# Altium PCB 4th_4G - V4.1.PcbDoc
Units mm, origin at the board's own origin, x right, y up, seen from the top; angles counter-clockwise.
Board outline 35.75 x 48.25 mm, 2 copper layers (Top Layer, Bottom Layer); 38 components, 24 nets, 250 pads, 39 vias.
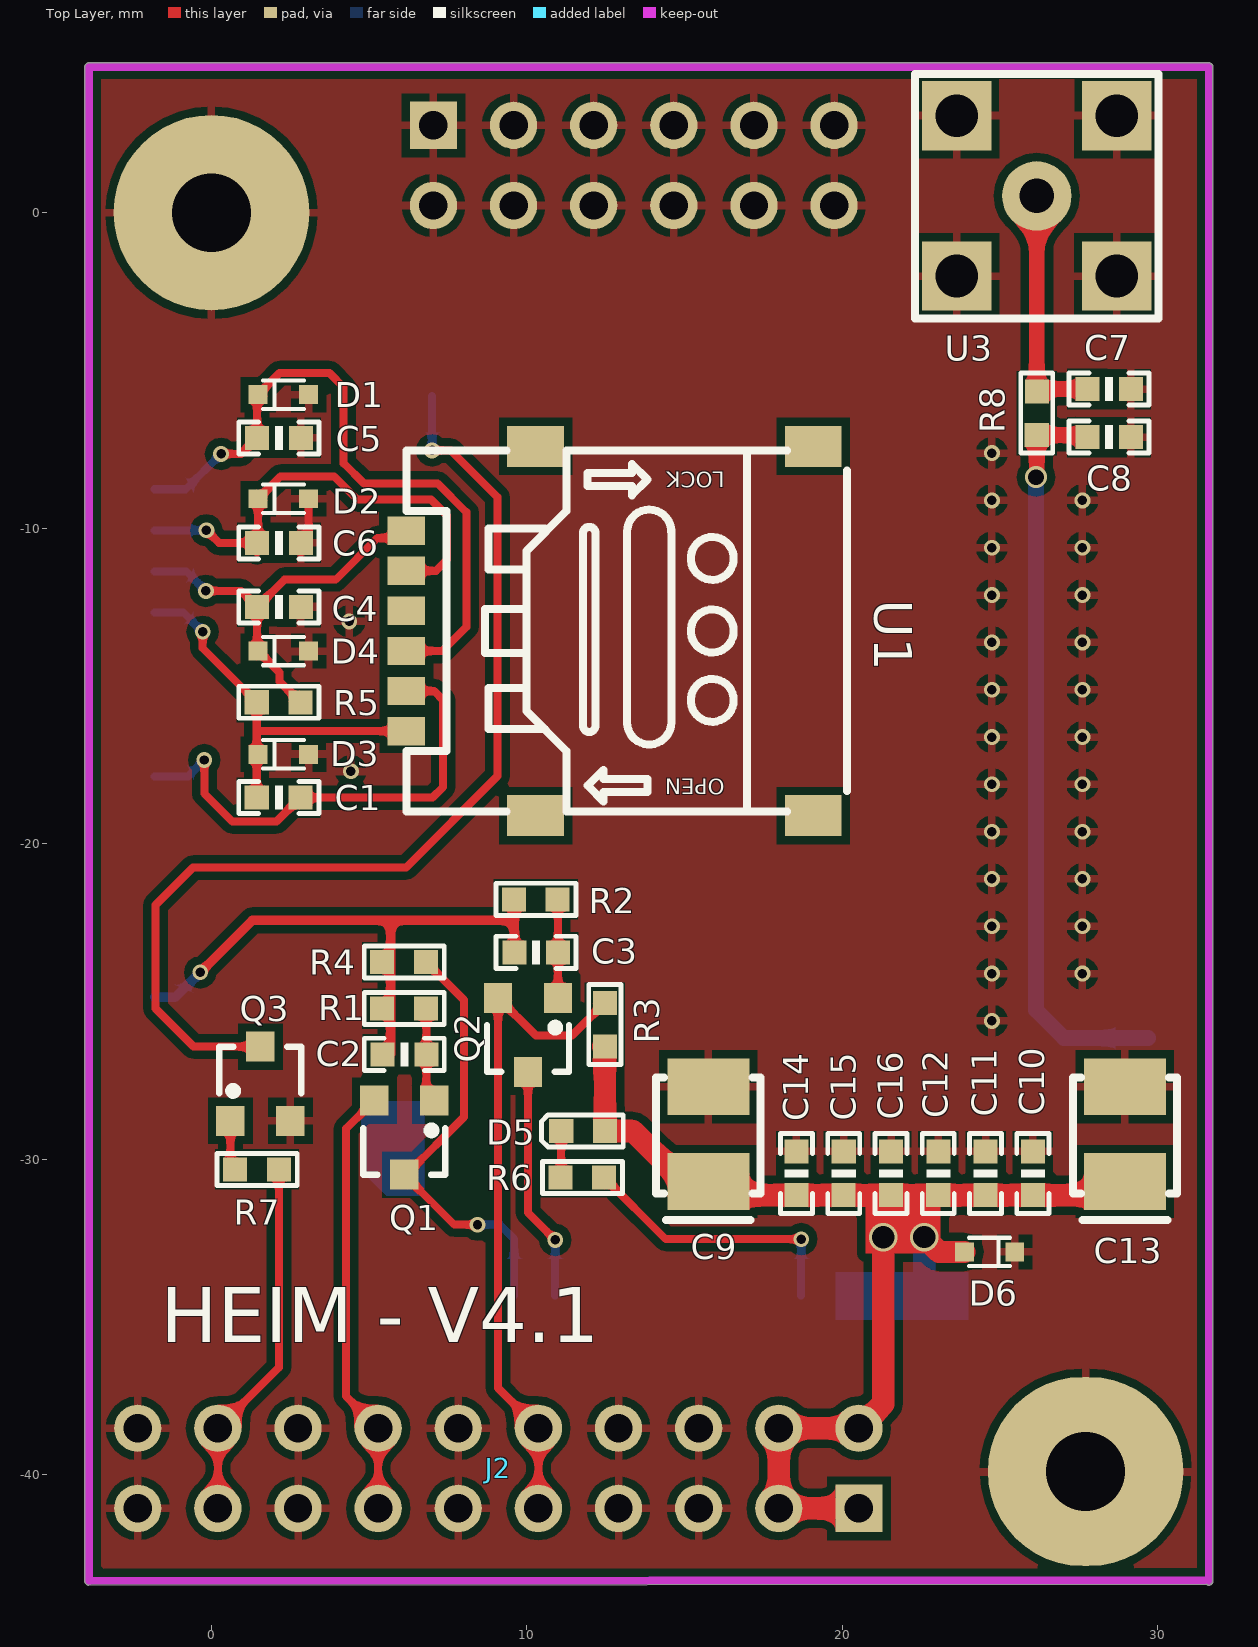
[diagram p0: Top Layer view]
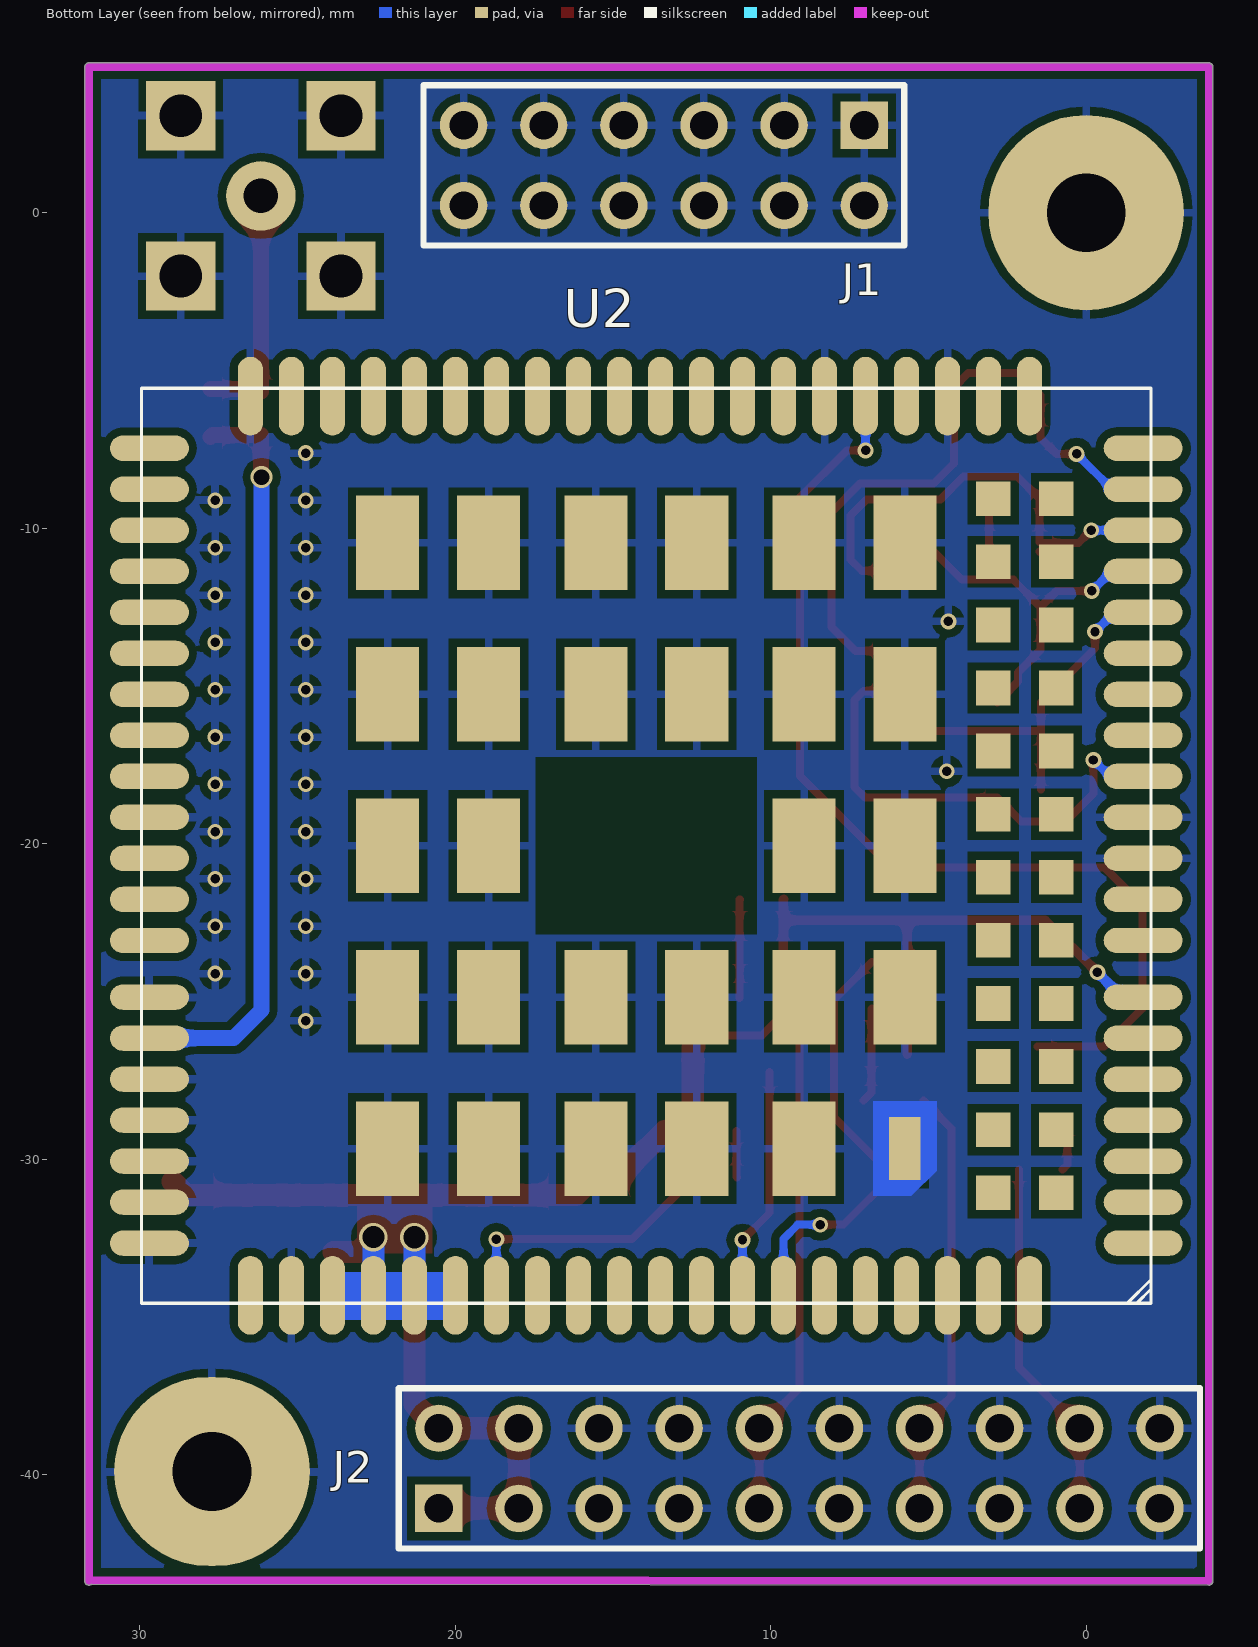
[diagram p1: Bottom Layer view, seen from below]

## Layer stack, top to bottom
Top Solder: solder mask 0.0102, Solder Resist, Dk 3.5
Top Layer: signal copper 0.0356
Dielectric 1: dielectric 0.32, FR-4, Dk 4.8
Bottom Layer: signal copper 0.0356
Bottom Solder: solder mask 0.0102, Solder Resist, Dk 3.5

## Board outline
-4.014,-43.377 -4.014,4.623 cw(c-3.886,4.623) -3.886,4.75 31.614,4.75 cw(c31.614,4.623) 31.741,4.623 31.741,-43.377 cw(c31.614,-43.377) 31.533,-43.476 -3.886,-43.505 cw(c-3.886,-43.377)

## Design rules (kind name [scope] priority, off if disabled: settings)
Clearance [All] p1: gap=0.254
PolygonConnect [All] p1: connectstyle=Relief reliefconductorwidth=0.254 reliefentries=4 polygonreliefangle="90 Angle" airgapwidth=0.254
RoutingVias [All] p1: holewidth=0.3 width=0.5 viastyle="Through Hole" minholewidth=0.3 minwidth=0.5 maxholewidth=1 maxwidth=1.5
SolderMaskExpansion [All] p1: expansion=0.102
Width [All] p1: maxlimit=1 minlimit=0.254 preferedwidth=0.254
30 further rules are at their usual default settings.

## Components (designator, comment, footprint, x,y, rotation, side; value= is the part's Value field where it differs from the comment)
C1 "100NF/50V" 0603_C 2.134,-18.542 r180 top
C2 "1NF/50V" 0603_C 6.111,-26.677 r0 top
C3 "1NF/50V" 0603_C 10.287,-23.444 r0 top
C4 "33PF/50V" 0603_C 2.134,-12.497 r0 top
C5 "33PF/50V" 0603_C 2.134,-7.137 r0 top
C6 "33PF/50V" 0603_C 2.134,-10.465 r0 top
C7 "[NC]" 0603_C 28.448,-5.588 r0 top
C8 "[NC]" 0603_C 28.448,-7.112 r0 top
C9 "100UF/6.3V" CASE-B_3528 15.748,-30.709 r270 top
C10 "100NF/50V" 0603_C 26.035,-30.455 r90 top
C11 "33PF/50V" 0603_C 24.536,-30.455 r90 top
C12 "10PF/50V" 0603_C 23.038,-30.455 r90 top
C13 "100UF/6.3V" CASE-B_3528 28.956,-30.709 r270 top
C14 "100NF/50V" 0603_C 18.542,-30.455 r90 top
C15 "33PF/50V" 0603_C 20.041,-30.455 r90 top
C16 "10PF/50V" 0603_C 21.539,-30.455 r90 top
D1 "PESDNC5D5VB" SOD-523 2.278,-5.766 r0 top
D2 "PESDNC5D5VB" SOD-523 2.278,-9.068 r0 top
D3 "PESDNC5D5VB" SOD-523 2.278,-17.17 r0 top
D4 "PESDNC5D5VB" SOD-523 2.278,-13.894 r0 top
D5 "绿色" 0603_D 11.786,-29.108 r180 top
D6 "PESDNC5D5VB" SOD-523 24.663,-32.944 r180 top
J1 "Header 6X2A" HDR2X6_CEN 7.036,2.769 r0 bottom locked
J2 "Header 10X2A" HDR2X10_CEN 20.523,-41.072 r180 top locked
Q1 "BC817-40" SOT-23-3 6.111,-29.318 r180 top
Q2 "BC817-40" SOT-23-3 10.033,-26.06 r180 top
Q3 "BC817-40" SOT-23-3 1.549,-27.61 r0 top
R1 "10KΩ/1%" 0603_R 6.111,-25.229 r180 top
R2 "10KΩ/1%" 0603_R 10.287,-21.768 r180 top
R3 "10KΩ/1%" 0603_R 12.471,-25.73 r270 top
R4 "10KΩ/1%" 0603_R 6.111,-23.756 r180 top
R5 "15K" 0603_R 2.134,-15.519 r180 top
R6 "470Ω/1%" 0603_R 11.76,-30.582 r180 top
R7 "4.7KΩ/1%" 0603_R 1.448,-30.328 r180 top
R8 "0Ω" 0603_R 26.162,-6.35 r270 top
U1 "SIM卡座" SIM卡座-NANO掀盖式 12.624,-13.259 r180 top
U2 "EC20 R2.0" EC20_R2.0 13.945,-20.066 r0 bottom
U3 "ANT" SMA-KWE/弯头 23.622,-2.007 r0 top

## Footprints (in the part's own frame and the unit in brackets; to place one, negate y for a bottom-side part, rotate by r counter-clockwise, add the part's x,y. Pads: shape width x height; smd on the part's side, far side on the other; paste and mask are expansions set on the pad)
0603_C [mil] "电容"
  rect 30x30 smd: 1(-27,0) 2(27.5,-0.06)
  silkscreen extent -50,-20 50,20
0603_D [mil] "贴片发光二极管"
  rect 30x30 smd: 1(-27,0) 2(27.5,-0.06)
  silkscreen extent -50,-20 52,20
0603_R [mil] "电阻"
  rect 30x30 smd: 1(-27,0) 2(27.5,-0.06)
  silkscreen extent -50,-20 50,20
CASE-B_3528 [mm]
  rect 1.8x2.6 smd: 1(0,0) 2(-3.002,0)
  silkscreen extent -3.3,-1.65 1.23,1.65
EC20_R2.0 [mm] "移远通信4G模块"
  oval 2.5x0.8 smd: 1(-15.75,12.6) 2(-15.75,11.3) 3(-15.75,10) 4(-15.75,8.7) 5(-15.75,7.4) 6(-15.75,6.1) 7(-15.75,4.8) 8(-15.75,0.4) 9(-15.75,-0.9) 10(-15.75,-2.2) 11(-15.75,-3.5) 12(-15.75,-4.8) 13(-15.75,-6.1) 14(-15.75,-7.4) 15(-15.75,-8.7) 16(-15.75,-10) 17(-15.75,-11.3) 18(-15.75,-12.6) 37(15.75,-12.6) 38(15.75,-11.3) 39(15.75,-10) 40(15.75,-8.7) 41(15.75,-7.4) 42(15.75,-6.1) 43(15.75,-4.8) 44(15.75,-3.5) 45(15.75,-2.2) 46(15.75,-0.9) 47(15.75,0.4) 48(15.75,4.8) 49(15.75,6.1) 50(15.75,7.4) 51(15.75,8.7) 52(15.75,10) 53(15.75,11.3) 54(15.75,12.6) 141(-15.75,3) 142(-15.75,1.7) 143(15.75,1.7) 144(15.75,3)
  oval 0.8x2.5 smd: 19(-9.55,-14.25) 20(-8.25,-14.25) 21(-6.95,-14.25) 22(-5.65,-14.25) 23(-4.35,-14.25) 24(-3.05,-14.25) 25(-1.75,-14.25) 26(-0.45,-14.25) 27(0.85,-14.25) 28(2.15,-14.25) 29(3.45,-14.25) 30(4.75,-14.25) 31(6.05,-14.25) 32(7.35,-14.25) 33(8.65,-14.25) 34(9.95,-14.25) 35(11.25,-14.25) 36(12.55,-14.25) 55(12.55,14.25) 56(11.25,14.25) 57(9.95,14.25) 58(8.65,14.25) 59(7.35,14.25) 60(6.05,14.25) 61(4.75,14.25) 62(3.45,14.25) 63(2.15,14.25) 64(0.85,14.25) 65(-0.45,14.25) 66(-1.75,14.25) 67(-3.05,14.25) 68(-4.35,14.25) 69(-5.65,14.25) 70(-6.95,14.25) 71(-8.25,14.25) 72(-9.55,14.25) 113(-10.85,14.25) 114(-12.15,14.25) 115(-10.85,-14.25) 116(-12.15,-14.25)
  rect 2x3 smd: 85(8.2,9.6) 86(8.2,4.8) 87(8.2,0) 88(8.2,-4.8) 89(8.2,-9.6) 90(5,9.6) 91(5,4.8) 92(5,0) 93(5,-4.8) 94(5,-9.6) 95(1.6,9.6) 96(1.6,4.8) 97(1.6,-4.8) 98(1.6,-9.6) 99(-1.6,9.6) 100(-1.6,4.8) 101(-1.6,-4.8) 102(-1.6,-9.6) 103(-5,9.6) 104(-5,4.8) 105(-5,0) 106(-5,-4.8) 107(-5,-9.6) 109(-8.2,4.8) 110(-8.2,0) 111(-8.2,-4.8) 112(-8.2,-9.6)
  rect 1x2 smd: 108(-8.2,9.6)
  rect 1.1x1.1 smd: 117(-11,11) 118(-11,9) 119(-11,7) 120(-11,5) 121(-11,3) 122(-11,1) 123(-11,-1) 124(-11,-3) 125(-11,-5) 126(-11,-7) 127(-11,-9) 128(-11,-11) 129(-13,11) 130(-13,9) 131(-13,7) 132(-13,5) 133(-13,3) 134(-13,1) 135(-13,-1) 136(-13,-3) 137(-13,-5) 138(-13,-7) 139(-13,-9) 140(-13,-11)
  Top Layer pour cut-out: 3.5,2.8 -3.5,2.8 -3.5,-2.8 3.5,-2.8
  Top Layer region: -9.2,10.3 -8.4,11.1 -7.2,11.1 -7.2,8.1 -9.2,8.1
  silkscreen extent -16,-14.5 16,14.5
HDR2X6_CEN [mm] "Connector; Header; 6x2 Position"
  rect 1.5x1.5 hole 0.9: 1(0,0)
  round 1.5 hole 0.9: 2(2.54,0) 3(5.08,0) 4(7.62,0) 5(10.16,0) 6(12.7,0) 7(0,2.54) 8(2.54,2.54) 9(5.08,2.54) 10(7.62,2.54) 11(10.16,2.54) 12(12.7,2.54)
  silkscreen extent -1.27,-1.27 13.97,3.81
HDR2X10_CEN [mm] "Connector; Header; 10x2 Position"
  rect 1.5x1.5 hole 0.9: 1(0,0)
  round 1.5 hole 0.9: 2(2.54,0) 3(5.08,0) 4(7.62,0) 5(10.16,0) 6(12.7,0) 7(15.24,0) 8(17.78,0) 9(20.32,0) 10(22.86,0) 11(0,-2.54) 12(2.54,-2.54) 13(5.08,-2.54) 14(7.62,-2.54) 15(10.16,-2.54) 16(12.7,-2.54) 17(15.24,-2.54) 18(17.78,-2.54) 19(20.32,-2.54) 20(22.86,-2.54)
SIM卡座-NANO掀盖式 [mm]
  rect 1.8x1.3 smd: 0(-6.451,5.853) 0(-6.451,-5.853) 0(2.349,5.853) 0(2.349,-5.853)
  rect 1.2x0.9 smd: 1(6.451,3.173) 2(6.451,0.633) 3(6.451,-1.907) 4(6.451,1.903) 5(6.451,-0.637) 6(6.451,-3.177)
  silkscreen extent -7.52,-5.72 6.45,5.72
SMA-KWE/弯头 [mm] "总长14.5mm/牙长8.5mm"
  rect 2.2x2.2 hole 1.35: 0(0,0) 0(0,5.08) 0(5.08,0) 0(5.08,5.08)
  round 2.2 hole 1.1: 1(2.54,2.54)
  silkscreen extent -1.32,-1.35 6.4,6.4
SOD-523 [mm]
  rect 0.6x0.6 smd: 1(-0.8,0) 2(0.8,0)
  silkscreen extent -0.65,-0.45 0.65,0.45
SOT-23-3 [mm]
  rect 0.9x0.95 smd: 1(-0.95,-1.175) 2(0.95,-1.175) 3(0,1.175)
  silkscreen extent -1.3,-0.35 1.3,1.18

## Part data
C1 C2 C3 C4 C5 C6 C7 C8 C10 C11 C12 C14 C15 C16: library part CAP, "无极性电容"
C9 C13: library part "CAP POLAR", "钽电容"
D1 D2 D3 D4 D6: library part TVS, "TVS 瞬态抑制二极管"
D5: library part LED, "发光二极管"
J1: "Header, 6-Pin, Dual row"
J2: "Header, 10-Pin, Dual row"
Q1 Q2: library part S8050, "NPN"
Q3: "NPN三极管"
R1 R2 R3 R4 R5 R6 R7 R8: library part RES2, "电阻"
U1: "无保护引脚SIM卡座"
U2: "移远通信4G"
U3: "天线座"

## Free pads (board coordinates)
  round 6.2 hole 2.5: 1(0,0)
  oval 6.2x6 hole 2.5: 2(27.711,-39.903)

## Via types
v1: diameter 0.5, hole 0.3, Top Layer to Bottom Layer, tented both sides, 36 vias
v2: diameter 0.9, hole 0.7, Top Layer to Bottom Layer, tented both sides, 2 vias
v3: diameter 0.7, hole 0.5, Top Layer to Bottom Layer, tented both sides, 1 vias

## Nets (pads, with @x,y where several pads share a name; then routed paths per layer and width w, separated by ;. In a path a pad name is that pad's centre, name@x,y a point inside that pad or via, vN(x,y) a via of type N, cw(c..) or ccw(c..) an arc to the next point about the centre after c; other vN are vias at no path point)
4G_POWER: J2.9 J2.19 R7.1 | length 11.5
  Top Layer w0.254: J2.9 J2.19 2.134,-36.601 R7.1
4G_RX: J2.5 J2.15 Q2.2 R3.1 | length 21
  Top Layer w0.254: J2.5 J2.15 9.083,-37.252 Q2.2 10.283,-26.086 11.43,-26.086 R3.1
4G_TX: J2.7 J2.17 Q1.2 | length 13.7
  Top Layer w0.254: Q1.2 4.267,-29.037 4.267,-37.516 J2.17 J2.7
ANT_MAIN: C8.1 R8.2 U2.49 | length 23.8
  Top Layer w0.5: v3@26.16,-8.38 R8.2 27.699,-7.048 C8.1
  Bottom Layer w0.5: v3(26.138,-8.384) 26.138,-25.275 27.026,-26.162 29.691,-26.162 U2.49
GND: C4.2 C5.2 C6.2 C7.2 C8.2 C9.2 C10.2 C11.2 C12.2 C13.2 C14.2 C15.2 C16.2 D1.2 D2.2 D3.2 D4.2 D6.1 J1.1 J1.2 J1.3 J1.4 J1.5 J1.6 J1.7 J1.8 J1.9 J1.10 J1.11 J1.12 J2.3 J2.4 J2.6 J2.8 J2.10 J2.13 J2.14 J2.16 J2.18 J2.20 pad.1 pad.2 Q3.2 U2.8 U2.9 U2.19 U2.22 U2.36 U2.46 U2.48 U2.50 U2.51 U2.52 U2.53 U2.54 U2.56 U2.72 U2.85 U2.86 U2.87 U2.88 U2.89 U2.90 U2.91 U2.92 U2.93 U2.94 U2.95 U2.96 U2.97 U2.98 U2.99 U2.100 U2.101 U2.102 U2.103 U2.104 U2.105 U2.106 U2.107 U2.108 U2.109 U2.110 U2.111 U2.112 U3.0 | length 1.5
  Top Layer w0.254: C6.2@2.832,-10.771 3.078,-10.525 3.078,-9.373
  other v1: 24.74,-25.62 24.74,-24.12 27.61,-24.12 24.74,-22.62 27.61,-22.62 24.74,-21.12 27.61,-21.12 24.74,-19.62 27.61,-19.62 24.74,-18.12 27.61,-18.12 4.42,-17.704 24.74,-16.62 27.61,-16.62 24.74,-15.12 27.61,-15.12 24.74,-13.62 27.61,-13.62 4.369,-12.954 24.74,-12.12 27.61,-12.12 24.74,-10.62 27.61,-10.62 24.74,-9.12 27.61,-9.12 24.74,-7.62
NET_MODE: U2.5
NET_STATUS: U2.6
NetC2_2: C2.2 Q1.1 R1.1 | length 3
  Top Layer w0.254: R1.1 6.81,-25.241 C2.2 6.81,-27.892 Q1.1
NetC3_2: C3.2 Q2.1 R2.1 | length 3.1
  Top Layer w0.254: R2.1 10.983,-21.778 Q2.1
NetC7_1: C7.1 R8.1 U3.1 | length 7.9
  Top Layer w0.5: U3.1@25.959,0.533 26.162,0.33 R8.1 26.238,-5.588 C7.1
NetD5_2: D5.2 R6.2 | length 1.5
  Top Layer w0.254: R6.2 11.087,-30.555 D5.2
NetQ3_1: Q3.1 R7.2 | length 1.6
  Top Layer w0.254: Q3.1 0.599,-30.176 R7.2
PWRKEY: Q3.3 U2.21 | length 32.9
  Top Layer w0.254: Q3.3 -0.565,-26.435 -1.778,-25.222 -1.778,-21.946 -0.584,-20.752 6.172,-20.752 9.068,-17.856 9.068,-9.017 7.585,-7.534 v1(6.995,-7.534)
  Bottom Layer w0.254: v1(6.995,-7.534) U2.21
RESET_EN: U2.20
RXD: Q1.3 R4.1 U2.68 | length 14.2
  Top Layer w0.254: R4.1 8.001,-24.96 8.001,-28.667 6.175,-30.493 Q1.3 7.698,-32.08 v1(8.433,-32.08)
  Bottom Layer w0.254: v1(8.433,-32.08) 9.144,-32.08 9.595,-32.531 U2.68
STATUS: R6.1 U2.61 | length 8.8
  Top Layer w0.254: R6.1 14.402,-32.538 v1(18.694,-32.538)
  Bottom Layer w0.254: U2.61 v1(18.694,-32.538)
TXD: Q2.3 U2.67 | length 7.4
  Top Layer w0.254: Q2.3 10.033,-31.699 v1(10.895,-32.561)
  Bottom Layer w0.254: U2.67 v1(10.895,-32.561)
USIM_CLK: C6.1 D2.1 U1.3 U2.16 | length 14.5
  Top Layer w0.254: v1(-0.16,-10.066) 0.239,-10.465 C6.1 1.478,-10.434 D2.1 2.189,-8.357 3.886,-8.357 4.623,-9.093 6.96,-9.093 7.468,-9.601 7.468,-10.998 7.114,-11.352 U1.3 ; C6.1@1.448,-10.77 C6.1@1.478,-10.739
  Bottom Layer w0.254: U2.16 v1(-0.16,-10.066)
USIM_DATA: C4.1 D4.1 R5.1 U1.6 U2.15 | length 13
  Top Layer w0.254: v1(-0.178,-11.989) 0.94,-11.989 C4.1 ; R5.1 2.159,-14.859 2.159,-14.575 D4.1 1.448,-13.863 C4.1 ; U1.6 5.943,-10.312 5.258,-10.312 3.937,-11.633 2.311,-11.633 C4.1
  Bottom Layer w0.254: U2.15 -0.801,-11.366 v1(-0.178,-11.989)
USIM_GND: C1.1 U1.4 U2.10 | length 15.3
  Top Layer w0.254: v1(-0.229,-17.348) -0.229,-18.415 0.659,-19.302 2.059,-19.302 C1.1 7.01,-18.542 7.341,-18.212 7.341,-15.443 7.06,-15.162 U1.4
  Bottom Layer w0.254: U2.10 -0.746,-17.866 v1(-0.229,-17.348)
USIM_RST: C5.1 D1.1 U1.2 U2.17 | length 21.3
  Top Layer w0.254: v1(0.305,-7.645) 0.94,-7.645 C5.1 1.448,-5.796 D1.1 2.159,-5.085 3.739,-5.085 4.191,-5.537 4.191,-7.943 4.833,-8.585 7.17,-8.585 8.077,-9.492 8.077,-13.132 7.317,-13.892 U1.2
  Bottom Layer w0.254: U2.17 -0.816,-8.766 v1(0.305,-7.645)
USIM_VDD: C1.2 D3.1 R5.2 U1.1 U2.14 | length 12.2
  Top Layer w0.254: v1(-0.279,-13.284) -0.279,-13.803 R5.2 C1.2@1.435,-18.286 ; 1.459,-16.432 U1.1
  Bottom Layer w0.254: U2.14 -0.898,-12.666 v1(-0.279,-13.284)
VBAT_BB: C9.1 C10.1 C11.1 C12.1 C13.1 C14.1 C15.1 C16.1 D5.1 D6.2 J2.1 J2.2 J2.11 J2.12 R3.2 U2.57 U2.58 U2.59 U2.60 | length 39.3
  Top Layer w0.7: R3.2@12.419,-26.429 12.471,-26.481 D5.1 13.36,-29.108 14.961,-30.709 C9.1 16.18,-31.14 C14.1 C15.1 C16.1 C12.1 C11.1 C10.1 28.524,-31.14 C13.1 ; J2.1 J2.2 J2.12 J2.11 21.295,-37.76 v2(21.295,-32.477) ; v2(22.595,-32.475) 23.063,-32.944 D6.2
  Bottom Layer w0.7: U2.59 v2(21.295,-32.477) ; U2.58 v2(22.595,-32.475)
VDD_EXT: C2.1 C3.1 R1.2 R2.2 R4.2 U2.7 | length 18.3
  Top Layer w0.3: v1(-0.356,-24.079) 1.295,-22.428 6.121,-22.428 9.601,-22.428 ; C2.1@5.679,-26.677 5.679,-22.428 ; R2.2 9.601,-21.779 C3.1
  Bottom Layer w0.3: U2.7 -1.142,-24.866 v1(-0.356,-24.079)
pads on no net: U1.0 U1.5 U2.1 U2.2 U2.3 U2.4 U2.11 U2.12 U2.13 U2.18 U2.23 U2.24 U2.25 U2.26 U2.27 U2.28 U2.29 U2.30 U2.31 U2.32 U2.33 U2.34 U2.35 U2.37 U2.38 U2.39 U2.40 U2.41 U2.42 U2.43 U2.44 U2.45 U2.47 U2.55 U2.62 U2.63 U2.64 U2.65 U2.66 U2.69 U2.70 U2.71 U2.113 U2.114 U2.115 U2.116 U2.117 U2.118 U2.119 U2.120 U2.121 U2.122 U2.123 U2.124 U2.125 U2.126 U2.127 U2.128 U2.129 U2.130 U2.131 U2.132 U2.133 U2.134 U2.135 U2.136 U2.137 U2.138 U2.139 U2.140 U2.141 U2.142 U2.143 U2.144

## Polygon pours and split planes (outlines as drawn)
GND on Bottom Layer "GND" (solid, remove dead copper, pour order 4): -3.886,4.623 31.614,4.623 31.614,-43.348 31.585,-43.377 -3.886,-43.377
GND on Top Layer "GND" (solid, remove dead copper, pour order 3): -3.886,4.623 31.614,4.623 31.614,-43.348 31.585,-43.377 -3.886,-43.377

## Keep-outs
Keep-Out Layer:
  lines w0.254: 31.614,-43.377 31.614,4.623 -3.886,4.623 -3.886,-43.377 31.614,-43.348

## Other copper
Top Layer:
  rectangle net VBAT_BB: 20.726,-32.995 23.114,-31.09
Bottom Layer:
  region net VBAT_BB: 24.003,-33.579 19.787,-33.579 19.787,-35.103 24.003,-35.103

## Silkscreen, mask and mechanical layers (free items; w line width, h text height)
Top Overlay:
  text "HEIM - V4.1" at -1.6,-36.373 h3

## Dimensions
-3.886,4.623 to -3.886,-43.377 on Keep-Out Layer
-3.886,4.623 to 31.614,4.623 on Keep-Out Layer

## Text inside footprints (layer, text, board x,y; h text height)
U1: Top Overlay "LOCK" at 16.275,-8.209 h0.5 r180; Top Overlay "OPEN" at 16.275,-17.937 h0.5 r180